# Altium PCB PCB1.PcbDoc
Units mm, origin at the board's own origin, x right, y up, seen from the top; angles counter-clockwise.
Board outline 73.66 x 53.34 mm, 2 copper layers (Top Layer, Bottom Layer); 69 components, 62 nets, 249 pads, 61 vias.
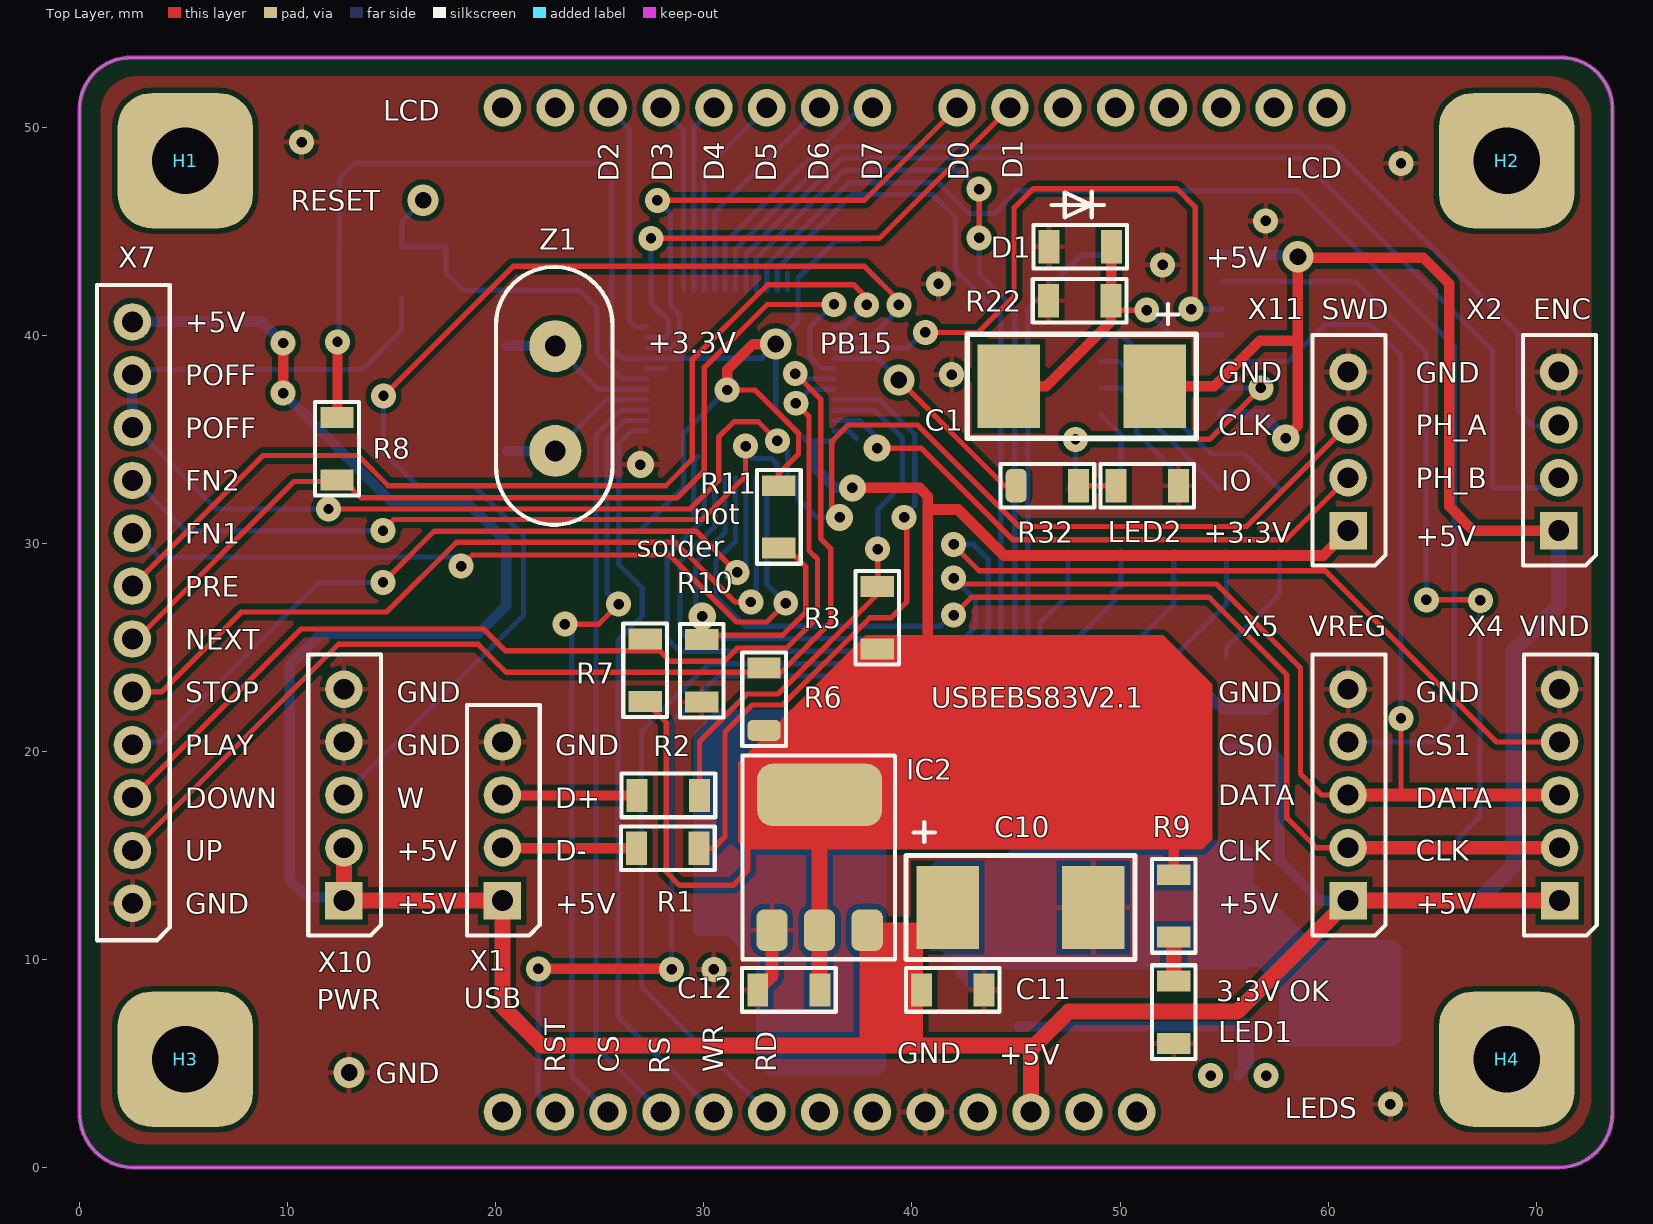
[diagram p0: Top Layer view]
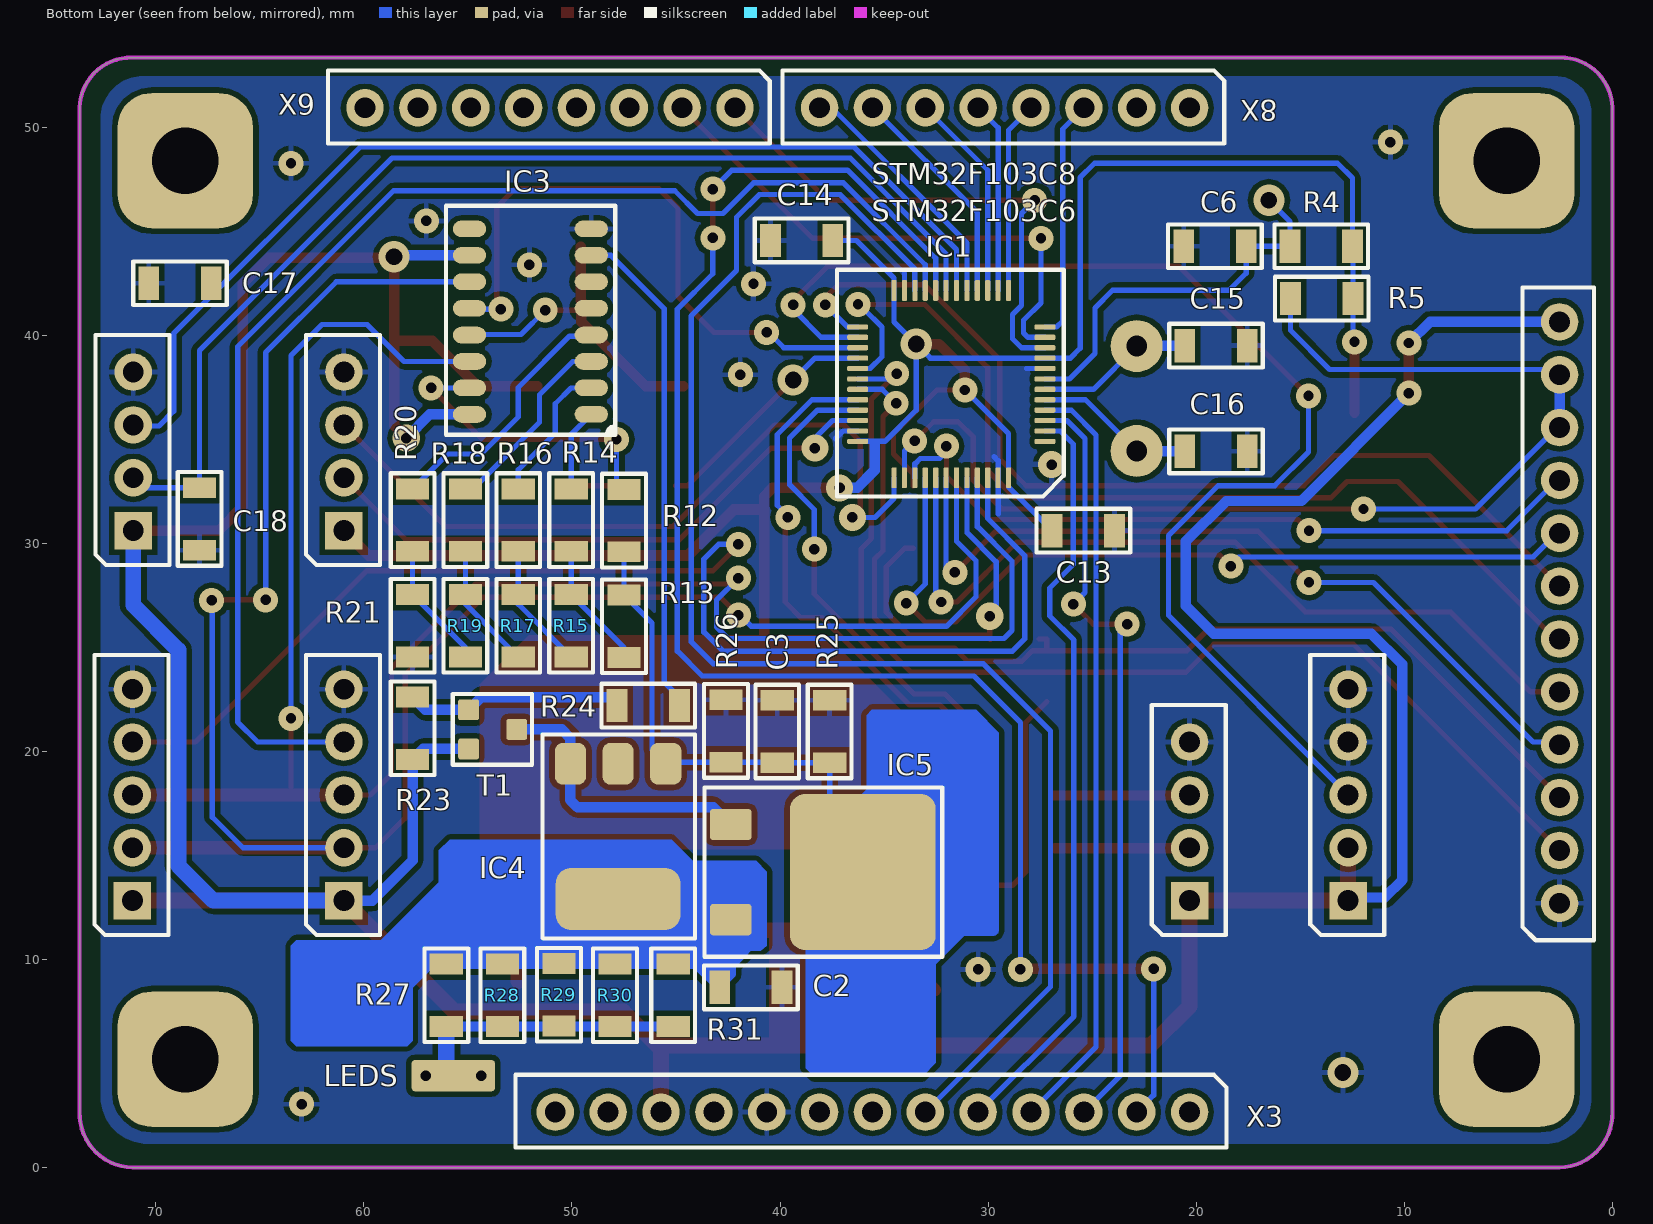
[diagram p1: Bottom Layer view, seen from below]

## Layer stack, top to bottom
Top Solder: solder mask 0.0102, Solder Resist, Dk 3.5
Top Layer: signal copper 0.0356
Dielectric 1: dielectric 0.32, FR-4, Dk 4.8
Bottom Layer: signal copper 0.0356
Bottom Solder: solder mask 0.0102, Solder Resist, Dk 3.5

## Board outline
2.54,0 71.12,0 ccw(c71.056,2.604) 73.66,2.667 73.66,50.927 ccw(c71.184,50.864) 71.12,53.34 2.54,53.34 ccw(c2.474,50.866) 0,50.927 0,2.667 ccw(c2.603,2.603)

## Design rules (kind name [scope] priority, off if disabled: settings)
Clearance [All] p1: gap=0.127 ignorepadtopadclearanceinfootprint=FALSE except(0: Arc-Hole Track-Hole SMDPad-Hole THPad-Hole Via-Hole Fill-Hole Poly-Hole Region-Hole Text-Hole; 0.254: Arc-Poly Arc-Region Track-Poly Track-Region SMDPad-Poly SMDPad-Region THPad-Poly THPad-Region Via-Poly Via-Region Fill-Poly Fill-Region Poly-Poly Poly-Region Region-Region)
PolygonConnect [All] p1: connectstyle=Relief reliefconductorwidth=0.254 reliefentries=4 polygonreliefangle="90 Angle" airgapwidth=0.254
RoomDefinition Sheet1 [InComponentClass('Sheet1')] p1: confinementstyle=ConfineIn formatcopy=TRUE lockcomponents=FALSE outline 161.163,-44.069 165.227,-44.069 165.227,-7.366 161.163,-7.366
RoutingVias [All] p1: holewidth=0.711 width=1.27 viastyle="Through Hole" minholewidth=0.711 minwidth=1.27 maxholewidth=0.711 maxwidth=1.27
SolderMaskExpansion [All] p1: expansion=0.102
Width [All] p1: maxlimit=1.27 minlimit=0.254 preferedwidth=0.254 minimp=50.000000 maximp=50.000000 favimp=50.000000
30 further rules are at their usual default settings.

## Components (designator, comment, footprint, x,y, rotation, side; value= is the part's Value field where it differs from the comment)
C1 "100.uF" "Конденсатор тантал 4x7" 48.158,37.541 r180 top
C2 "0.1uF" "SMD 1206 Конденсатор" 41.401,8.661 r180 bottom
C3 "0.1uF" "SMD 1206 Конденсатор" 40.132,20.955 r90 bottom
C6 "0.1 uF" "SMD 1206 Конденсатор" 19.101,44.272 r0 bottom
C10 "47uF" "Конденсатор тантал 4x7" 45.217,12.497 r0 top
C11 "0.1uF" "SMD 1206 Конденсатор" 41.959,8.534 r0 top
C12 "0.1uF" "SMD 1206 Конденсатор" 34.085,8.534 r180 top
C13 "0.1uF" "SMD 1206 Конденсатор" 25.424,30.607 r180 bottom
C14 "0.1uF" "SMD 1206 Конденсатор" 38.964,44.552 r0 bottom
C15 "12 pF" "SMD 1206 Конденсатор" 19.05,39.497 r180 bottom
C16 "12pF" "SMD 1206 Конденсатор" 19.05,34.417 r180 bottom
C17 "0.1uF" "SMD 1206 Конденсатор" 68.834,42.494 r0 bottom
C18 "0.1uF" "SMD 1206 Конденсатор" 67.894,31.167 r270 bottom
D1 "1N4148" "SMD 1206 Диод" 48.082,44.247 r0 top
H1 "*" "Отверстие 3,2" 5.08,48.387 r0 top
H2 "*" "Отверстие 3,2" 68.58,48.387 r0 top
H3 "*" "Отверстие 3,2" 5.08,5.207 r0 top
H4 "*" "Отверстие 3,2" 68.58,5.207 r0 top
IC1 "STM32F103C8T6" STM32F103C8T6 31.77,37.647 r0 bottom
IC2 "AMS1117-3.3" SOT-223 35.56,13.407 r0 top
IC3 "74HC595" SO-16 52.045,40.716 r90 bottom
IC4 "FSP2160 - 1.8V" SOT-223 47.781,17.406 r0 bottom
IC5 "LF18" TO-252 37.795,14.199 r90 bottom
LED1 "GREEN" "SMD 1206 Светодиод ВАЙТ" 52.578,7.469 r270 top
LED2 "GREEN" "SMD 1206 Светодиод ВАЙТ" 51.308,32.766 r0 top
R1 "*" "SMD 1206 Резистор"#1 28.27,15.342 r0 top
R2 "*" "SMD 1206 Резистор"#1 28.294,17.882 r0 top
R3 "10K" "SMD 1206 Резистор"#1 38.329,26.417 r90 top
R4 "10K" "SMD 1206 Резистор"#1 13.994,44.272 r0 bottom
R5 "10K" "SMD 1206 Резистор"#1 13.97,41.758 r0 bottom
R6 "10K" "SMD 1206 Резистор"#2 32.893,22.504 r90 top
R7 "10K" "SMD 1206 Резистор"#1 27.178,23.901 r90 top
R8 "10K" "SMD 1206 Резистор"#1 12.37,34.544 r270 top
R9 "470" "SMD 1206 Резистор"#1 52.578,12.573 r270 top
R10 "10K" "SMD 1206 Резистор"#1 29.896,23.876 r270 top
R11 "10K" "SMD 1206 Резистор"#1 33.604,31.267 r270 top
R12 "2K" "SMD 1206 Резистор"#1 47.498,31.091 r270 bottom
R13 "1K" "SMD 1206 Резистор"#1 47.498,26.011 r270 bottom
R14 "2K" "SMD 1206 Резистор"#1 50.038,31.115 r270 bottom
R15 "1K" "SMD 1206 Резистор"#1 50.038,26.035 r90 bottom
R16 "2K" "SMD 1206 Резистор"#1 52.578,31.115 r270 bottom
R17 "1K" "SMD 1206 Резистор"#1 52.578,26.035 r270 bottom
R18 "2K" "SMD 1206 Резистор"#1 55.118,31.115 r270 bottom
R19 "1K" "SMD 1206 Резистор"#1 55.118,26.035 r270 bottom
R20 "2K" "SMD 1206 Резистор"#1 57.658,31.115 r270 bottom
R21 "2K" "SMD 1206 Резистор"#1 57.658,26.035 r270 bottom
R22 "10 K" "SMD 1206 Резистор"#1 48.057,41.656 r180 top
R23 "10 KOhm" "SMD 1206 Резистор"#1 57.658,21.107 r270 bottom
R24 "200 Ohm" "SMD 1206 Резистор"#1 46.33,22.2 r180 bottom
R25 "*" "SMD 1206 Резистор"#1 37.617,20.955 r270 bottom
R26 "*" "SMD 1206 Резистор"#1 42.596,20.98 r90 bottom
R27 "*" "SMD 1206 Резистор"#1 56.032,8.28 r270 bottom
R28 "*" "SMD 1206 Резистор"#1 53.34,8.28 r270 bottom
R29 "*" "SMD 1206 Резистор"#1 50.622,8.306 r270 bottom
R30 "*" "SMD 1206 Резистор"#1 47.93,8.28 r270 bottom
R31 "*" "SMD 1206 Резистор"#1 45.136,8.28 r270 bottom
R32 "470" "SMD 1206 Резистор"#3 46.506,32.766 r180 top
T1 "Si2301DS" "SMD SOT-23 Транзистор 3 pin" 53.823,21.057 r90 bottom
X1 "*" "(1x4)PIN 2.54 HEADR" 20.36,17.907 r180 top
X2 "*" "(1x4)PIN 2.54 HEADR" 71.12,35.687 r180 top
X3 "1x13pin 2.54 Header" "(1x13)pin 2.54 header" 33.02,2.667 r0 bottom
X4 "*" "(1x5)pin 2.54 Header" 71.16,17.907 r180 top
X5 "*" "(1x5)pin 2.54 Header" 61,17.907 r180 top
X7 "1x12pin 2.54 Header" "(1x12)pin 2.54 header" 2.54,25.4 r90 top
X8 "1x8pin 2.54 Header" "(1x8)PIN 2.54 HEADER" 20.32,50.927 r0 bottom
X9 "1x8pin 2.54 Header" "(1x8)PIN 2.54 HEADER" 42.164,50.927 r0 bottom
X10 "1x5pin 2.54 Header" "(1x5)pin 2.54 Header" 12.74,17.907 r180 top
X11 "*" "(1x4)PIN 2.54 HEADR" 61,35.687 r180 top
Z1 "8MHz" "Кварцевый резонатор" 22.86,36.957 r270 top

## Footprints (in the part's own frame and the unit in brackets; to place one, negate y for a bottom-side part, rotate by r counter-clockwise, add the part's x,y. Pads: shape width x height; smd on the part's side, far side on the other; paste and mask are expansions set on the pad)
"(1x4)PIN 2.54 HEADR" [mm]
  rect 1.8x1.8 hole 1: 1(0.04,5.08)
  round 1.8 hole 1: 2(0.04,2.54) 3(0.04,0) 4(0.04,-2.54)
  silkscreen extent -1.75,-4.33 1.75,6.75, body extent -1.2,-3.81 1.28,6.35, height 8.54
"(1x5)pin 2.54 Header" [mm]
  rect 1.8x1.8 hole 1: 1(0.04,5.08)
  round 1.8 hole 1: 2(0.04,2.54) 3(0.04,0) 4(0.04,-2.54) 5(0.04,-5.08)
  silkscreen extent -1.75,-6.75 1.75,6.75, body extent -1.26,-6.38 1.28,6.32, height 8.54
"(1x8)PIN 2.54 HEADER" [mm]
  round 1.8 hole 1: 1(0,0) 2(2.54,0) 3(5.08,0) 4(7.62,0) 5(10.16,0) 6(12.7,0) 7(15.24,0) 8(17.78,0)
  silkscreen extent -1.67,-1.79 19.56,1.71, body extent -1.24,-1.3 19.05,1.27, height 8.54
"(1x12)pin 2.54 header" [mm]
  round 1.8 hole 1: 1(-12.7,0) 2(-10.16,0) 3(-7.62,0) 4(-5.08,0) 5(-2.54,0) 6(0,0) 7(2.54,0) 8(5.08,0) 9(7.62,0) 10(10.16,0) 11(12.7,0) 12(15.24,0)
  silkscreen extent -14.48,-1.79 17.02,1.71, body extent -13.94,-1.3 16.51,1.27, height 8.54
"(1x13)pin 2.54 header" [mm]
  round 1.8 hole 1: 1(-12.7,0) 2(-10.16,0) 3(-7.62,0) 4(-5.08,0) 5(-2.54,0) 6(0,0) 7(2.54,0) 8(5.08,0) 9(7.62,0) 10(10.16,0) 11(12.7,0) 12(15.24,0) 13(17.78,0)
  silkscreen extent -14.48,-1.79 19.68,1.71, body extent -13.94,-1.3 19.05,1.25, height 8.54
"SMD 1206 Диод" [mm]
  rect 1x1.6 smd: 1(-1.5,0) 2(1.5,0)
  silkscreen extent -2.25,-1.05 2.25,1.05, body extent -1.75,-0.73 1.75,0.73, height 1.48
"SMD 1206 Конденсатор" [mm]
  rect 1x1.6 smd: 1(-1.5,0) 2(1.5,0)
  silkscreen extent -2.25,-1.05 2.25,1.05, body extent -1.6,-0.8 1.6,0.8, height 0.94
"SMD 1206 Резистор"#1 [mm]
  rect 1x1.6 smd: 1(-1.5,0) 2(1.5,0)
  silkscreen extent -2.25,-1.05 2.25,1.05, body extent -1.51,-0.77 1.51,0.78, height 0.55
"SMD 1206 Резистор"#2 [mm]
  rrect50% 1x1.6 smd: 1(-1.5,0)
  rect 1x1.6 smd: 2(1.5,0)
  silkscreen extent -2.25,-1.05 2.25,1.05, body extent -1.51,-0.77 1.51,0.78, height 0.55
"SMD 1206 Резистор"#3 [mm]
  rect 1x1.6 smd: 1(-1.5,0)
  rrect50% 1x1.6 smd: 2(1.5,0)
  silkscreen extent -2.25,-1.05 2.25,1.05, body extent -1.51,-0.77 1.51,0.78, height 0.55
"SMD 1206 Светодиод ВАЙТ" [mm]
  rect 1x1.6 smd: 1(-1.5,0) 2(1.5,0)
  silkscreen extent -2.25,-1.05 2.25,1.05, body extent -1.57,-0.79 1.63,0.81, height 1.1
"SMD SOT-23 Транзистор 3 pin" [mm]
  rrect20% 1x1 smd: 1(0.94,1.143) 2(0,-1.168) 3(-0.94,1.143)
  silkscreen extent -1.7,-1.91 1.7,1.91, body extent -1.5,-1.25 1.5,1.25, height 1.15
SO-16 [mm]
  oval 0.8x1.6 smd: 1(-4.52,-2.975) 2(-3.25,-2.975) 3(-1.98,-2.975) 4(-0.71,-2.975) 5(0.58,-2.975) 6(1.85,-2.975) 7(3.12,-2.975) 8(4.39,-2.975) 9(4.39,2.875) 10(3.12,2.875) 11(1.85,2.875) 12(0.575,2.875) 13(-0.71,2.875) 14(-1.98,2.875) 15(-3.25,2.875) 16(-4.525,2.875)
  silkscreen extent -5.5,-4.12 5.5,4, body extent -5.07,-3.07 4.9,3.07, height 1.88
SOT-223 [mm]
  rrect50% 1.5x2 smd: 1(-2.29,-2) 2(0,-2) 3(2.29,-2)
  rrect50% 6x3 smd: 4(0,4.5)
  silkscreen extent -3.7,-3.4 3.62,6.4, body extent -3.25,-2.25 3.25,4.75, height 1.66
STM32F103C8T6 [mm] "MCU"
  rrect50% 1x0.25 smd: 1(-4.5,2.75) 2(-4.5,2.25) 3(-4.5,1.75) 4(-4.5,1.25) 5(-4.5,0.75) 6(-4.5,0.25) 7(-4.5,-0.25) 8(-4.5,-0.75) 9(-4.5,-1.25) 10(-4.5,-1.75) 11(-4.5,-2.25) 12(-4.5,-2.75) 25(4.5,-2.75) 26(4.5,-2.25) 27(4.5,-1.75) 28(4.5,-1.25) 29(4.5,-0.75) 30(4.5,-0.25) 31(4.5,0.25) 32(4.5,0.75) 33(4.5,1.25) 34(4.5,1.75) 35(4.5,2.25) 36(4.5,2.75)
  rrect50% 0.25x1 smd: 13(-2.75,-4.5) 14(-2.25,-4.5) 15(-1.75,-4.5) 16(-1.25,-4.5) 17(-0.75,-4.5) 18(-0.25,-4.5) 19(0.25,-4.5) 20(0.75,-4.5) 21(1.25,-4.5) 22(1.75,-4.5) 23(2.25,-4.5) 24(2.75,-4.5) 37(2.75,4.5) 38(2.25,4.5) 39(1.75,4.5) 40(1.25,4.5) 41(0.75,4.5) 42(0.25,4.5) 43(-0.25,4.5) 44(-0.75,4.5) 45(-1.25,4.5) 46(-1.75,4.5) 47(-2.25,4.5) 48(-2.75,4.5)
  silkscreen extent -5.4,-5.5 5.5,5.4, body extent -4.5,-4.5 4.5,4.5, height 1.6
TO-252 [mm]
  rrect20% 1.5x2 smd: 1(2.286,4.572) 3(-2.286,4.572)
  rrect20% 7.5x7 smd: 2(0,-1.778)
  silkscreen extent -4.06,-5.59 4.06,5.84, body extent -3.29,-4.73 3.29,4.97, height 2.3
"Кварцевый резонатор" [mm]
  round 2.5 hole 1: 1(-2.52,0) 2(2.52,0)
  silkscreen extent -6.32,-2.85 6.06,2.75, body extent -5.68,-2.33 5.67,2.32, height 3.6
"Конденсатор тантал 4x7" [mm]
  rect 3x4 smd: 1(-3.5,0) 2(3.5,0)
  silkscreen extent -5.5,-2.5 5.5,2.5, body extent -3.75,-2 3.75,2, height 2.95
"Отверстие 3,2" [mm]
  rrect50% 6.5x6.5 hole 3.2: 1(0,0)

## Part data
C1 C2 C3 C6 C10 C11 C12 C13 C14 C15 C16 C17 C18: library part Конденсатор
D1: library part Диод
H1 H2 H3 H4: library part "Отверстие монтажное"
IC2: library part AMS1117
IC3: library part 74HC595D
IC4: library part "FSP2160B J1003H1"
LED1 LED2: library part Светодиод
R1 R2 R3 R4 R5 R6 R7 R8 R9 R10 R11 R12 R13 R14 R15 R16 R17 R18 R19 R20 R21 R22 R23 R24 R25 R26 R27 R28 R29 R30 R31 R32: library part Резистор
T1: library part "Транзистор MOSFET P-конал (как p-n-p)"
X1 X2 X11: library part "(1x4)pin 2.54 Header"
X4 X5: library part "1x5pin 2.54 Header"
Z1: library part "Кварцевый резонатор"

## Free pads (board coordinates)
  rrect20% 4x1.5 smd far side: 2(55.702,4.418)

## Via types
v1: diameter 1.2, hole 0.5, Top Layer to Bottom Layer, tented both sides, 49 vias
v2: diameter 1.5, hole 0.8, Top Layer to Bottom Layer, tented bottom, 5 vias
v3: diameter 1.3, hole 0.5, Top Layer to Bottom Layer, tented both sides, 5 vias
v4: diameter 1.3, hole 0.5, Top Layer to Bottom Layer, tented bottom, 1 vias
v5: diameter 1.2, hole 0.5, Top Layer to Bottom Layer, 1 vias

## Nets (pads, with @x,y where several pads share a name; then routed paths per layer and width w, separated by ;. In a path a pad name is that pad's centre, name@x,y a point inside that pad or via, vN(x,y) a via of type N, cw(c..) or ccw(c..) an arc to the next point about the centre after c; other vN are vias at no path point)
+3.3V: C12.1 C13.1 C14.1 IC1.9 IC1.24 IC1.36 IC1.48 IC2.2 IC2.4 R3.1 R4.1 R5.1 R6.1 R7.1 R8.1 R9.1 R11.1 X11.1 | length 134.7
  Top Layer w0.254: R7.1 28.194,21.385 28.194,14.199 28.829,13.564 31.394,13.564 32.106,14.275 32.106,15.494 ; v1(31.115,37.363) 32.461,37.363 34.544,35.281 34.544,34.29 33.604,33.35 R11.1 ; C12.1@35.56,8.56 C12.1
  Top Layer w0.5: R8.1@12.395,36.269 v1(12.395,39.675) ; v1(31.115,37.363) 31.115,38.329 32.36,39.573 v2(33.452,39.573) ; R9.1 52.578,15.875
  Top Layer w0.508: v3(37.135,32.664) 40.361,32.664 40.767,32.258 40.767,31.623 ; 41.504,25.273 40.767,25.273 40.767,31.623 ; X11.1 59.766,29.413 44.425,29.413 42.215,31.623 40.767,31.623
  Top Layer w0.762: C12.1@35.56,8.56 IC2.2 35.56,15.697
  Bottom Layer w0.254: v1(12.395,39.675) 12.47,39.75 R5.1 12.47,44.248 R4.1 12.494,47.546 13.208,48.26 24.892,48.26 25.578,47.574 25.578,39.37 26.051,38.897 IC1.9 32.776,38.897 v2(33.452,39.573) ; C13.1 29.02,32.703 IC1.48 29.02,35.268 v1(31.115,37.363) ; IC1.36 34.953,34.897 33.452,36.398 v2(33.452,39.573) ; C14.1 36.322,44.552 34.52,42.75 IC1.24 34.52,40.641 v2(33.452,39.573)
  Bottom Layer w0.508: 35.458,34.773 35.458,33.503 36.297,32.664 v3(37.135,32.664)
+5V: C1.1 C10.1 C11.1 IC2.3 IC3.10 IC3.16 R23.2 T1.3 X1.1 X2.1 X3.11 X4.1 X5.1 X7.12 X10.1 X10.2 | length 220.7
  Top Layer w0.5: v1(9.779,37.211) v1(9.779,39.624) ; C1.1 54.534,37.541 56.718,39.726 58.547,39.726 ; v3(57.963,35.052) 58.547,35.636 58.547,39.726 ; X2.1 66.98,30.607 65.811,31.775 65.811,42.469 64.567,43.713 58.547,43.713 58.547,39.726
  Top Layer w0.762: X10.2 X10.1 X1.1 20.32,7.747 22.2,5.867 37.821,5.867 ; C10.1 41.717,11.407 IC2.3 37.85,5.897 37.821,5.867 ; X3.11 45.72,5.69 47.523,7.493 55.626,7.493 X5.1 X4.1 ; 45.72,5.867 37.821,5.867
  Bottom Layer w0.5: X7.12 8.763,40.64 v1(9.779,39.624) ; v1(9.779,37.211) 14.961,32.029 18.567,32.029 20.498,30.099 20.498,27 19.152,25.654 11.582,25.654 10.109,24.181 10.109,13.818 10.947,12.979 12.548,12.979 X10.1 ; IC3.16 56.824,36.191 v3(57.963,35.052) ; IC3.10 58.475,43.836 v2(58.547,43.764) ; T1.3 57.149,20.117 R23.2 57.658,14.773 59.604,12.827 X5.1
  Bottom Layer w0.762: X5.1 67.234,12.827 68.91,14.503 68.91,24.867 71.08,27.036 X2.1
BL: IC3.7 R24.2 | length 23.9
  Bottom Layer w0.254: R24.2@44.777,22.25 44.777,22.552 45.568,23.343 45.568,41.275 48.129,43.836 IC3.7
BOOT: IC1.44 R10.1 R11.2 | length 17.6
  Top Layer w0.254: R10.1 R10.1@29.921,25.401 ; v4(29.921,26.492) R10.1@29.921,25.401 ; R11.2 33.987,29.767 34.9,28.854 34.9,26.695 33.782,25.578 30.098,25.578 R10.1@29.921,25.401
  Bottom Layer w0.254: v4@29.616,26.645 29.616,29.108 31.02,30.512 IC1.44
BP3: IC1.39 X7.9 | length 35.8
  Top Layer w0.254: v1(14.58,30.607) 15.113,31.14 29.921,31.14 32.004,33.223 v1(32.004,34.671)
  Bottom Layer w0.254: X7.9@2.54,33.147 5.08,30.607 v1(14.58,30.607) ; v1(32.004,34.671) 32.004,34.392 32.325,34.071 33.264,34.071 33.52,33.815 IC1.39
BP4: IC1.40 X7.8 | length 40.4
  Top Layer w0.254: v1(18.339,28.905) 18.872,29.439 28.346,29.439 31.572,26.213 33.02,26.213 v1(33.934,27.127)
  Bottom Layer w0.254: X7.8@2.54,30.607 3.81,29.337 17.974,29.337 v1@18.339,28.972 ; IC1.40 33.02,28.042 v1(33.934,27.127)
BP5: IC1.41 X7.5 | length 40.3
  Top Layer w0.254: X7.5@2.54,22.987 2.667,22.86 3.937,22.86 7.772,26.695 14.757,26.695 18.11,30.048 28.626,30.048 31.496,27.178 v1(32.258,27.178)
  Bottom Layer w0.254: v1(32.258,27.178) 32.258,27.051 32.52,27.313 IC1.41
BP6: IC1.42 X7.4 | length 39.1
  Top Layer w0.254: v1(14.58,28.118) 17.043,30.582 29.616,30.582 v1(31.598,28.6)
  Bottom Layer w0.254: X7.4@2.54,20.447 3.81,20.447 11.481,28.118 v1(14.58,28.118) ; v1(31.598,28.6) 32.011,28.6 32.02,28.591 IC1.42
BP10: IC1.21 X5.4 | length 63.6
  Bottom Layer w0.254: IC1.21 33.02,43.383 36.957,47.32 41.275,47.32 42.748,45.847 43.967,45.847 45.06,46.939 58.572,46.939 66.065,39.446 66.065,21.412 65.1,20.447 X5.4
BP12: IC1.25 X7.7 | length 47.8
  Top Layer w0.254: X7.7@2.54,28.067 2.667,28.067 8.814,34.214 13.386,34.214 14.834,32.766 28.169,32.766 29.439,34.036 29.439,38.811 33.045,42.418 37.211,42.418 37.821,41.808 v1(37.821,41.453)
  Bottom Layer w0.254: IC1.25 36.765,40.397 v1(37.821,41.453)
GND: C2.2 C3.2 C6.2 C10.2 C11.2 C12.2 C13.2 C14.2 C15.2 C16.2 C17.2 C18.2 D1.1 IC1.8 IC1.23 IC1.35 IC1.47 IC2.1 IC3.8 LED1.2 LED2.2 R10.2 R21.2 R22.2 R25.1 R26.2 X1.4 X2.4 X3.9 X4.5 X5.5 X7.1 X10.4 X10.5 X11.4 | length 8.9
  Top Layer w0.635: C12.2 33.27,9.219 IC2.1
  Bottom Layer w0.254: IC1.8 28.151,38.397 ; 29.52,31.425 IC1.47 29.52,33.965 29.718,34.163 ; IC1.23 34.02,42.951 ; IC1.35 36.968,35.397 37.338,35.027
  other v1: 62.992,3.048 30.48,9.525 41.91,38.1 41.275,42.469 52.045,43.383 56.998,45.491 63.5,48.26 10.668,49.276
  other v2: 12.954,4.572
  other v3: 26.949,33.782
INFSP: IC4.3 IC5.1 T1.2 | length 13.9
  Bottom Layer w0.5: IC5.1 43.205,17.323 49.733,17.323 50.071,17.661 IC4.3 50.071,20.633 50.495,21.057 T1.2
LEDS: pad.2 R27.2 R28.2 R29.2 R30.2 R31.2 | length 13.3
  Bottom Layer w0.5: R31.2 R30.2 R28.2 R27.2 ; pad.2 55.887,4.772 55.9,4.797 pad.2@56.032,5.029
  Bottom Layer w0.8: pad.2@56.032,5.029 R27.2
  other v1: 54.356,4.42
  other v5: 57.023,4.42
NetC3_1: C3.1 IC4.1 IC5.2 R12.2 R13.1 R25.2 R26.1 | length 24.9
  Bottom Layer w0.254: IC5.2 37.617,15.799 R25.2 C3.1 40.157,19.48 R26.1 45.417,19.48 IC4.1 46.152,20.066 46.152,26.165 R13.1 R12.2
NetC15_1: C15.1 IC1.6 Z1.1 | length 7.6
  Bottom Layer w0.254: Z1.1@22.84,39.497 Z1.1 24.94,37.397 IC1.6
  Bottom Layer w0.508: C15.1 Z1.1@22.84,39.497
NetC16_1: C16.1 IC1.5 Z1.2 | length 7.7
  Bottom Layer w0.254: Z1.2@22.84,34.417 Z1.2 25.32,36.897 IC1.5
  Bottom Layer w0.508: C16.1 Z1.2@22.84,34.417
NetIC3_1: IC3.1 R14.1 | length 4
  Bottom Layer w0.254: IC3.1 50.038,35.228 R14.1
NetIC3_2: IC3.2 R16.1 | length 6.9
  Bottom Layer w0.254: IC3.2 50.037,37.466 50.8,36.703 50.8,35.306 52.578,33.528 R16.1
NetIC3_3: IC3.3 R18.1 | length 9.4
  Bottom Layer w0.254: IC3.3 49.961,38.736 51.562,37.135 51.562,35.814 54.761,32.615 R18.1
NetIC3_4: IC3.4 R20.1 | length 12.5
  Bottom Layer w0.254: IC3.4 49.122,39.954 50.114,39.954 52.578,37.49 52.578,36.068 54.356,34.29 55.983,34.29 R20.1
NetLED1_1: LED1.1 R9.2 | length 2.1
  Top Layer w0.762: LED1.1 R9.2
NetLED2_1: LED2.1 R32.1 | length 1.8
  Top Layer w0.254: R32.1@47.982,32.766 R32.1 LED2.1
NetR1_1: R1.1 X1.2 | length 6.5
  Top Layer w0.254: X1.2 X1.2@20.345,15.342
  Top Layer w0.5: X1.2@20.345,15.342 R1.1
NetR2_1: R2.1 X1.3 | length 6.5
  Top Layer w0.254: X1.3 X1.3@20.345,17.882
  Top Layer w0.5: X1.3@20.345,17.882 R2.1
NetR13_2: R13.2 R14.2 R15.2 | length 6.1
  Bottom Layer w0.254: R13.2 47.498,24.995 49.757,27.254 49.657,27.353 R15.2@49.657,27.669 ; R15.2@49.781,27.792 49.904,27.916 50.038,27.916 R14.2
NetR15_1: R15.1 R16.2 R17.1 | length 6.1
  Bottom Layer w0.254: R15.1 52.578,27.075 R17.1 R16.2
NetR17_2: R17.2 R18.2 R19.1 | length 6.1
  Bottom Layer w0.254: R17.2 55.118,27.075 R19.1 R18.2
NetR19_2: R19.2 R20.2 R21.1 | length 6.1
  Bottom Layer w0.254: R19.2 55.118,24.995 R21.1 R20.2
NetR23_1: R23.1 R24.1 T1.1 | length 10.3
  Bottom Layer w0.5: R24.1@47.904,22.607 54.355,22.607 T1.1 57.047,21.996 R23.1
OE: C1.2 D1.2 IC3.13 R22.1 | length 15.5
  Top Layer w0.254: R22.1@49.682,41.199 v1(51.283,41.199)
  Top Layer w0.5: C1.2 46.457,37.541 49.557,40.641 R22.1 49.582,41.681 D1.2
  Bottom Layer w0.254: v1(51.283,41.199) 52.451,40.03 54.895,40.03 IC3.13
OL: C2.1 IC4.4 IC5.3 R27.1 R28.1 R29.1 R30.1 R31.1 | length 20.1
  Bottom Layer w0.5: IC5.3 42.367,9.323 42.953,8.738 43.996,9.78 R31.1 R30.1 ; IC4.4 47.781,9.929 R30.1 ; R27.1 R28.1 R30.1
PA0: IC1.10 X9.1 | length 25.1
  Top Layer w0.254: v1(27.762,46.482) 37.719,46.482 X9.1
  Bottom Layer w0.254: IC1.10 28.399,39.397 28.829,39.827 28.829,40.996 28.397,41.427 28.397,45.847 v1(27.762,46.482)
PA1: IC1.11 X9.2 | length 25.9
  Top Layer w0.254: v1(27.457,44.653) 38.43,44.653 X9.2
  Bottom Layer w0.254: IC1.11 28.086,39.897 28.296,40.107 28.296,40.716 27.457,41.554 27.457,44.145 27.483,44.171 27.457,44.196 v1(27.457,44.653)
PA2: IC1.12 X8.3 | length 11.6
  Bottom Layer w0.254: X8.3 26.416,49.911 26.416,40.691 26.71,40.397 IC1.12
PA3: IC1.13 X8.4 | length 9.2
  Bottom Layer w0.254: X8.4 29.02,49.847 IC1.13
PA4: IC1.14 X8.5 | length 9.2
  Bottom Layer w0.254: IC1.14 29.52,49.967 X8.5
PA5: IC1.15 X8.6 | length 10
  Bottom Layer w0.254: IC1.15 30.02,47.927 X8.6
PA6: IC1.16 X8.7 | length 10.9
  Bottom Layer w0.254: IC1.16 30.52,45.887 X8.7
PA7: IC1.17 X8.8 | length 12.1
  Bottom Layer w0.254: IC1.17 31.02,44.431 37.516,50.927 X8.8
PA8: IC1.29 R8.2 X7.6 | length 48.6
  Top Layer w0.254: X7.6@2.54,25.527 2.87,25.527 10.312,32.969 12.751,32.969 13.538,32.182 28.702,32.182 30.023,33.503 30.023,38.456 33.045,41.478 v1(36.253,41.478)
  Bottom Layer w0.254: v1@36.17,41.663 v1@36.119,41.613 ; v1(36.253,41.478) v1@36.119,41.613 ; IC1.29 35.669,38.397 35.103,38.964 35.103,40.386 35.984,41.268 35.984,41.478 v1@36.119,41.613
PA9: IC1.30 R6.2 X7.2 | length 53.8
  Top Layer w0.254: X7.2@2.54,15.367 2.667,15.367 12.446,25.146 19.152,25.146 20.498,23.8 33.706,23.8 36.093,26.187 36.093,29.743 35.611,30.226 35.611,36.932 v1(34.392,38.151)
  Bottom Layer w0.254: v1(34.392,38.151) 34.645,37.897 IC1.30
PA10: IC1.31 R7.2 X7.3 | length 51.3
  Top Layer w0.254: X7.3@2.54,17.907 2.667,17.907 10.643,25.883 19.406,25.883 20.447,24.841 27.864,24.841 28.372,24.333 30.988,24.333 31.623,24.968 33.985,24.968 35.458,26.441 35.458,29.235 35.052,29.642 35.052,36.093 v1(34.417,36.728) ; R7.2@27.178,25.019 R7.2 R7.2@27.558,25.401
  Bottom Layer w0.254: v1(34.417,36.728) 35.086,37.397 IC1.31
PA15: IC1.38 R5.2 X7.10 X7.11 | length 55.7
  Top Layer w0.254: v1(11.963,31.648) 29.337,31.648 30.709,33.02 30.709,35.103 31.445,35.839 32.614,35.839 v1(33.528,34.925)
  Bottom Layer w0.254: X7.11@2.489,38.354 13.589,38.354 15.47,40.235 R5.2 ; X7.10 2.667,35.56 6.579,31.648 v1(11.963,31.648) ; v1(33.528,34.925) 34.02,34.433 IC1.38
  Bottom Layer w0.5: X7.10 X7.11
PB0: C17.1 IC1.18 X2.3 | length 51.6
  Bottom Layer w0.254: IC1.18 31.52,44.118 36.449,49.047 60.173,49.047 69.139,40.081 69.139,36.347 69.851,35.635 70.537,35.635 X2.3@71.12,35.052
PB1: C18.1 IC1.19 X2.2 | length 53.4
  Bottom Layer w0.254: IC1.19 32.02,43.907 36.627,48.514 58.649,48.514 67.894,39.268 C18.1 70.6,32.667 X2.2
PB2: IC1.20 X3.2 | length 80.1
  Top Layer w0.254: v1(43.231,44.679) v1(43.231,47.015)
  Top Layer w0.508: v1(22.047,9.55) 28.169,9.55 28.194,9.525 28.321,9.652 v1(28.448,9.525)
  Bottom Layer w0.254: v1(22.047,9.55) 22.047,3.48 X3.2@22.352,3.175 ; v1(28.448,9.525) 28.448,21.387 30.683,23.622 43.739,23.622 44.933,24.816 44.933,41.25 43.231,42.951 v1(43.231,44.679) ; IC1.20 32.52,43.696 36.754,47.93 42.316,47.93 v1(43.231,47.015)
PB7: IC1.43 IC3.11 X4.2 X5.2 | length 99.8
  Top Layer w0.254: v1(42,26.543) 42.864,27.407 54.28,27.407 58.014,23.673 58.014,16.789 59.436,15.367 X5.2 ; v1(64.719,27.28) 67.285,27.28 v1(67.31,27.254)
  Top Layer w0.635: X5.2 X4.2
  Bottom Layer w0.254: IC1.43 31.52,30.098 30.582,29.159 30.582,27.432 32.004,26.01 41.377,26.01 v1@41.91,26.543 ; IC3.11 61.32,42.566 64.719,39.167 v1(64.719,27.28) ; X5.2 65.811,15.367 67.285,16.84 67.285,27 v1@67.081,27.203
PB8: IC1.45 IC3.14 X4.3 X5.3 | length 93.6
  Top Layer w0.254: v1@41.91,28.321 42.189,28.042 54.635,28.042 58.674,24.003 58.674,18.917 59.684,17.907 X5.3 ; 63.144,18.034 63.271,17.907 ; 63.5,17.907 v1(63.5,21.59)
  Top Layer w0.635: X5.3 63.271,17.907 63.5,17.907 X4.3
  Bottom Layer w0.254: IC1.45 30.52,30.799 28.854,29.134 28.854,25.806 29.235,25.425 42.494,25.425 43.053,25.984 43.053,27.268 v1(42,28.321) v1@41.91,28.321 ; IC3.14 58.066,38.736 59.842,40.513 62.001,40.513 63.5,39.014 v1(63.5,21.59) 63.348,21.59 v1@63.195,21.742
PB9: IC1.46 X4.4 | length 63.1
  Top Layer w0.254: v1@41.961,29.947 43.231,28.677 59.868,28.677 68.097,20.447 X4.4
  Bottom Layer w0.254: IC1.46 30.02,31.188 28.245,29.413 28.245,25.4 28.829,24.816 42.748,24.816 43.663,25.73 43.663,29.235 42.951,29.947 v1(42,29.947) v1@41.961,29.947
PB11: IC1.22 X3.6 | length 72.7
  Bottom Layer w0.254: X3.6 27,8.687 27,20.98 30.226,24.206 43.205,24.206 44.272,25.273 44.272,40.919 42.088,43.104 42.088,45.669 40.996,46.761 37.109,46.761 33.52,43.172 IC1.22
PB13: IC1.26 X10.3 | length 59.2
  Top Layer w0.254: v1(14.605,37.084) 20.828,43.307 37.719,43.307 39.37,41.656 v1(39.37,41.453)
  Bottom Layer w0.254: X10.3 21.336,26.543 21.336,30.378 18.948,32.766 16.231,32.766 14.605,34.392 v1(14.605,37.084) ; IC1.26 38.017,39.897 39.37,41.25 v1(39.37,41.453)
PB14: IC1.27 IC3.12 | length 30.1
  Top Layer w0.254: v1@40.637,40.488 40.992,40.132 43.18,40.132 44.907,41.859 44.907,46.117 45.831,47.041 52.721,47.041 53.619,46.142 53.619,41.25 v1(53.416,41.25)
  Bottom Layer w0.254: IC1.27 39.818,39.397 40.553,40.132 v1(40.64,40.132) ; v1(53.416,41.25) 54.878,41.25 IC3.12
PB15: IC1.28 R32.2 | length 11.3
  Top Layer w0.254: v2(39.37,37.846) 44.45,32.766 R32.2
  Bottom Layer w0.254: IC1.28 38.319,38.897 v2(39.37,37.846)
PC13: IC1.2 X3.5 | length 36.6
  Bottom Layer w0.254: IC1.2 26.532,35.397 25.908,34.773 25.908,28.981 27.037,27.853 27.037,26.503 25.883,25.349 25.883,7.264 X3.5
PC14: IC1.3 X3.3 | length 37.8
  Top Layer w0.254: v1(23.317,26.111) 24.943,26.111 v1(25.908,27.076)
  Bottom Layer w0.254: v1(23.317,26.111) 23.647,25.781 23.647,4.42 X3.3 ; v1(25.908,27.076) 25.349,27.635 25.349,35.03 26.216,35.897 IC1.3
PC15: IC1.4 X3.4 | length 36.8
  Bottom Layer w0.254: IC1.4 26.008,36.397 24.816,35.204 24.816,5.791 X3.4
q15: IC3.15 R12.1 | length 14.3
  Top Layer w0.254: v1(47.857,34.993) 54.297,34.993 v1(56.769,37.465)
  Bottom Layer w0.254: R12.1 47.857,32.95 v1(47.857,34.993) ; IC3.15 v1(56.769,37.465) v1(56.769,37.465)
RES: C6.1 IC1.7 R4.2 | length 19.1
  Bottom Layer w0.254: v2(16.51,46.482) 15.494,45.466 R4.2 C6.1 17.601,42.978 18.415,42.164 24.012,42.164 24.867,41.31 24.867,39.116 26.086,37.897 IC1.7
SWDCLK: IC1.37 X11.3 | length 37.3
  Top Layer w0.254: v3(36.525,31.242) v3@36.525,30.937 ; X11.3 56.083,30.81 45.136,30.81 40.259,35.687 36.932,35.687 36.144,34.9 36.144,31.318 v3@36.525,30.937 ; v3@36.525,30.937 36.627,30.836 36.601,30.81 36.525,30.886 v3@36.525,30.937
  Bottom Layer w0.254: IC1.37 34.52,32.155 35.433,31.242 v3(36.525,31.242)
SWDIO: IC1.34 X11.2 | length 28.1
  Top Layer w0.254: v3(38.329,34.569) 40.437,34.569 44.831,30.175 57.988,30.175 X11.2
  Bottom Layer w0.254: IC1.34 37.484,35.897 v3@38.316,35.065
USBDM: IC1.32 R1.2 | length 30.7
  Top Layer w0.254: R1.2 30.455,15.342 31.013,15.9 31.013,20.93 32.309,22.225 33.782,22.225 37.973,26.416 38.989,26.416 39.751,27.178 39.751,31.039 v1@39.548,31.242
  Bottom Layer w0.254: IC1.32 38.465,36.897 40.132,35.23 40.132,31.826 39.624,31.318 v1(39.624,31.242)
USBDP: IC1.33 R2.2 R3.2 | length 25.9
  Top Layer w0.254: R2.2 29.794,20.472 32.08,22.758 33.553,22.758 38.354,27.559 v1(38.354,29.718)
  Bottom Layer w0.254: IC1.33 38.203,36.397 39.548,35.052 39.548,32.817 38.354,31.623 v1(38.354,29.718)
pads on no net: H1.1 H2.1 H3.1 H4.1 IC1.1 IC3.5 IC3.6 IC3.9 IC4.2 X3.1 X3.7 X3.8 X3.10 X3.12 X3.13 X8.1 X8.2 X9.3 X9.4 X9.5 X9.6 X9.7 X9.8

## Polygon pours and split planes (outlines as drawn)
GND on Top Layer "Bottom Layer-No Net" (solid, remove dead copper, pour order 16): 2.794,52.451 70.587,52.451 cw(c70.587,50.394) 72.644,50.394 72.644,3.404 cw(c70.358,3.404) 70.358,1.118 3.175,1.118 cw(c3.175,3.277) 1.016,3.277 1.016,50.673 cw(c2.794,50.673)
GND on Bottom Layer "Bottom Layer-No Net" (solid, remove dead copper, pour order 0): 2.794,52.451 70.587,52.451 cw(c70.587,50.394) 72.644,50.394 72.644,3.404 cw(c70.383,3.404) 70.383,1.143 3.251,1.143 cw(c3.251,3.378) 1.016,3.378 1.016,25.046 1.016,50.673 cw(c2.794,50.673)

## Keep-outs
Keep-Out Layer:
  the board outline again, w0.2

## Other copper
Top Layer:
  region net +5V: 37.85,11.278 40.513,11.278 40.513,5.969 37.922,5.969 37.85,5.897
  region net +3.3V: 31.648,15.621 31.648,19.456 37.77,25.578 52.07,25.578 54.432,23.216 54.432,15.773 53.95,15.291 32.055,15.291
Bottom Layer:
  region net OL: 40.64,10.668 40.64,14.224 41.148,14.732 44.196,14.732 45.212,15.748 55.88,15.748 56.388,15.24 56.388,13.716 59.182,10.922 63.246,10.922 63.5,10.668 63.5,6.096 63.246,5.842 57.912,5.842 57.658,6.096 57.658,8.636 56.642,9.652 43.867,9.652 43.18,8.965 42.726,8.965 41.402,10.409 40.932,10.409
  region net NetC3_1: 29.489,20.904 30.582,21.996 35.585,21.996 35.839,21.742 35.839,18.186 38.76,15.265 38.76,4.775 38.379,4.394 33.147,4.394 32.512,5.029 32.512,9.779 31.471,10.82 31.153,11.138 29.756,11.138 cw(c29.756,11.405) 29.489,11.405

## Silkscreen, mask and mechanical layers (free items; w line width, h text height)
Top Overlay:
  lines w0.2: 40.081,16.104 41.097,16.104 ; 40.589,15.646 40.589,16.612 ; 46.711,46.253 49.225,46.253 ; 48.641,45.669 48.641,46.888 ; 51.791,40.996 52.807,40.996 ; 52.299,40.538 52.299,41.504 ; 47.346,45.669 47.346,46.863 48.616,46.253 47.346,45.669
  text "LCD" at 14.605,50.292 h0.99
  text "LCD" at 57.963,47.549 h0.99
  text "D1" at 45.314,47.498 h0.99 r90
  text "D7" at 38.583,47.422 h0.99 r90
  text "D0" at 42.723,47.422 h0.99 r90
  text "D4" at 30.988,47.396 h0.99 r90
  text "D6" at 35.992,47.396 h0.99 r90
  text "D2" at 25.908,47.371 h0.99 r90
  text "D3" at 28.473,47.371 h0.99 r90
  text "D5" at 33.477,47.371 h0.99 r90
  text "RESET" at 10.16,45.974 h0.99
  text "+5V" at 54.153,43.231 h1
  text "SWD" at 59.69,40.767 h0.99
  text "ENC" at 69.85,40.767 h0.99
  text "+5V" at 5.08,40.132 h0.99
  text "+3.3V" at 27.305,39.141 h1
  text "PB15" at 35.56,39.116 h1
  text "GND" at 54.72,37.719 h0.99
  text "GND" at 64.22,37.719 h0.99
  text "POFF" at 5.08,37.592 h0.99
  text "CLK" at 54.72,35.179 h0.99
  text "PH_A" at 64.22,35.179 h0.99
  text "POFF" at 5.08,35.052 h0.99
  text "PH_B" at 64.22,32.639 h0.99
  text "FN2" at 5.08,32.512 h0.99
  text "IO" at 54.864,32.512 h0.99
  text "not" at 29.489,30.912 h1
  text "+3.3V" at 54.026,30.023 h0.99
  text "FN1" at 5.08,29.972 h0.99
  text "+5V" at 64.22,29.845 h0.99
  text "solder" at 26.772,29.362 h1
  text "PRE" at 5.08,27.432 h0.99
  text "VREG" at 59.055,25.527 h0.99
  text "VIND" at 69.215,25.527 h0.99
  text "NEXT" at 5.08,24.892 h0.99
  text "STOP" at 5.08,22.352 h0.99
  text "GND" at 15.24,22.352 h0.99
  text "GND" at 54.72,22.352 h0.99
  text "GND" at 64.22,22.352 h0.99
  text "USBEBS83V2.1" at 40.919,22.098 h0.99
  text "PLAY" at 5.08,19.812 h0.99
  text "GND" at 15.24,19.812 h0.99
  text "GND" at 22.86,19.812 h0.99
  text "CS0" at 54.72,19.812 h0.99
  text "CS1" at 64.22,19.812 h0.99
  text "DATA" at 54.72,17.399 h0.99
  text "DOWN" at 5.08,17.272 h0.99
  text "W" at 15.24,17.272 h0.99
  text "D+" at 22.86,17.272 h0.99
  text "DATA" at 64.22,17.272 h0.99
  text "UP" at 5.08,14.732 h0.99
  text "+5V" at 15.24,14.732 h0.99
  text "D-" at 22.86,14.732 h0.99
  text "CLK" at 54.72,14.732 h0.99
  text "CLK" at 64.22,14.732 h0.99
  text "GND" at 5.08,12.192 h0.99
  text "+5V" at 15.24,12.192 h0.99
  text "+5V" at 22.86,12.192 h0.99
  text "+5V" at 54.72,12.192 h0.99
  text "+5V" at 64.22,12.192 h0.99
  text "3.3V OK" at 54.61,8.001 h0.99
  text "USB" at 18.466,7.645 h0.99
  text "PWR" at 11.405,7.595 h0.99
  text "GND" at 39.294,5.004 h0.99
  text "+5V" at 44.196,4.953 h0.99
  text "WR" at 30.937,4.572 h0.99 r90
  text "RD" at 33.477,4.572 h0.99 r90
  text "RST" at 23.343,4.547 h0.99 r90
  text "CS" at 25.908,4.547 h0.99 r90
  text "RS" at 28.372,4.496 h0.99 r90
  text "GND" at 14.224,4.064 h0.99
  text "LEDS" at 57.912,2.362 h0.99
Bottom Overlay:
  lines w0.2: 47.955,35.433 47.981,35.433 cw(c47.981,35.306) 48.108,35.306 ; 47.955,35.611 cw(c47.955,35.255) 48.311,35.255
  text "STM32F103C8" at 35.585,47.244 h1
  text "STM32F103C6" at 35.585,45.466 h1
  text "LEDS" at 61.925,3.912 h1